# Altium PCB tach key1-3.PcbDoc
Units mm, origin at the board's own origin, x right, y up, seen from the top; angles counter-clockwise.
Board outline 151 x 86.38 mm, 2 copper layers (Top Layer, Bottom Layer); 36 components, 25 nets, 89 pads, 0 vias.
Unrouted connection lines stored in the file: 5.
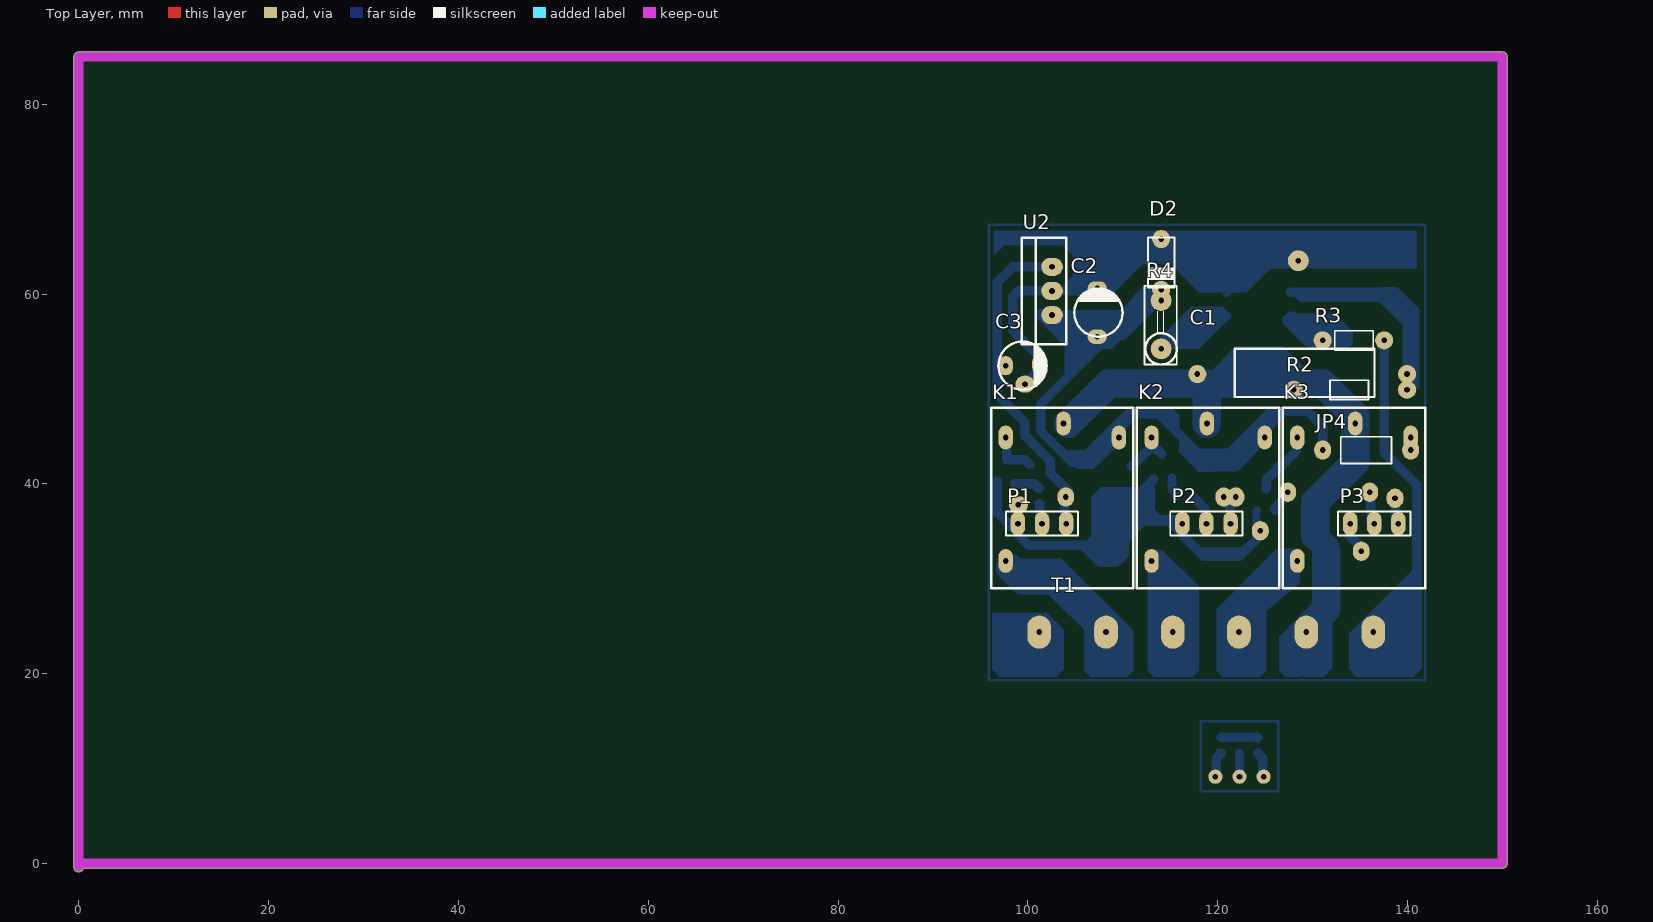
[diagram p0: Top Layer view]
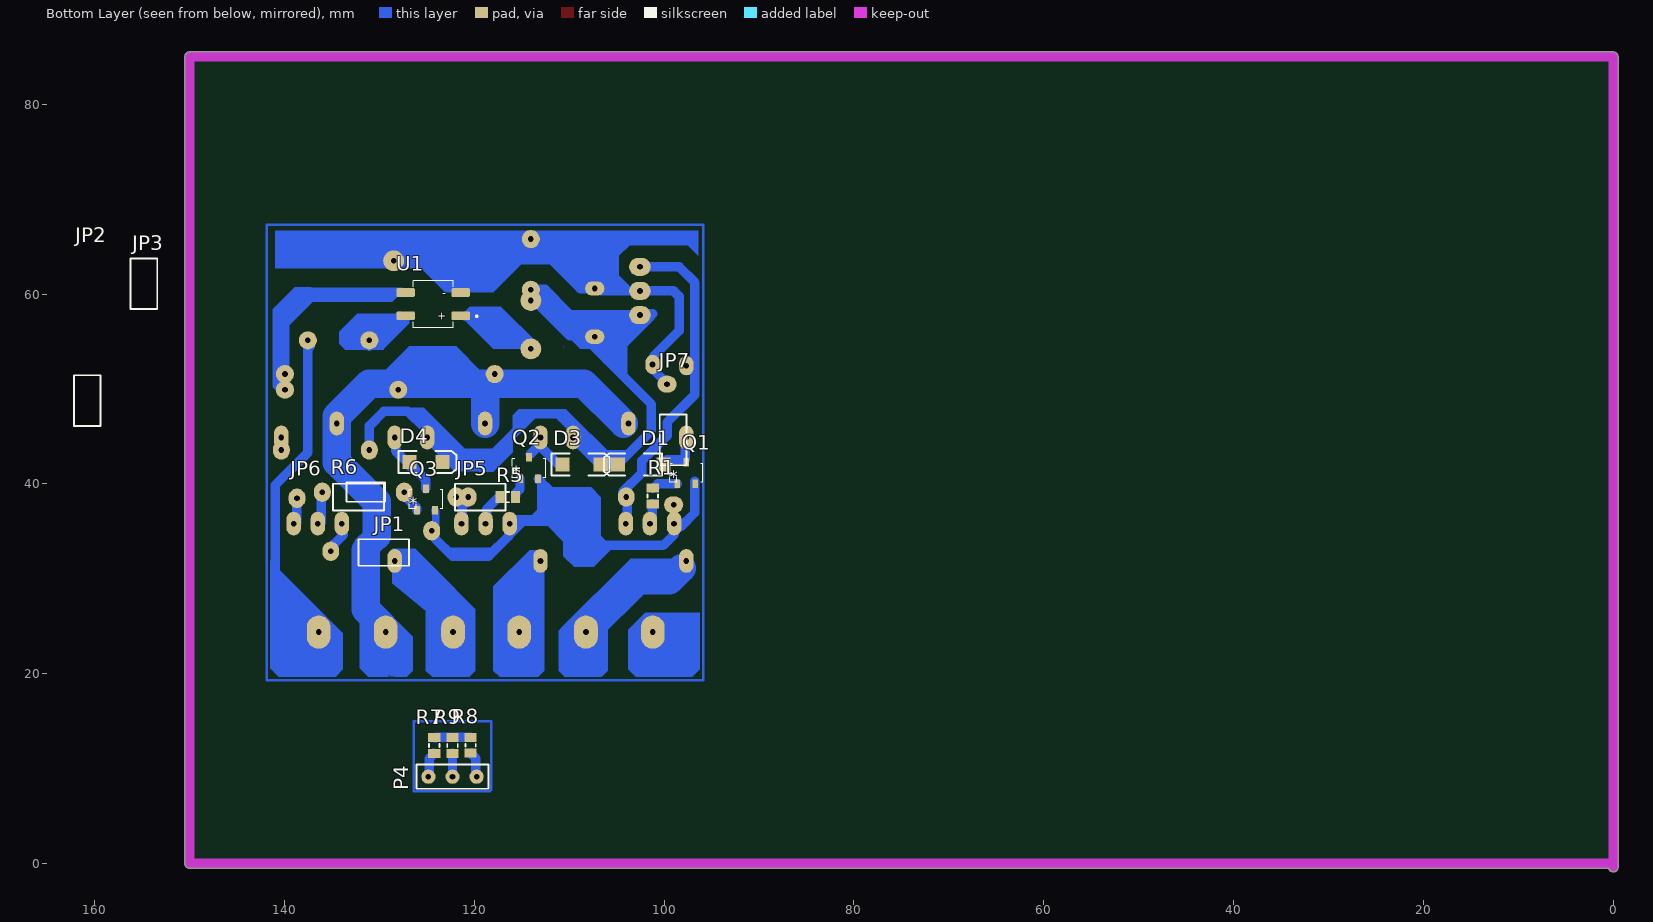
[diagram p1: Bottom Layer view, seen from below]
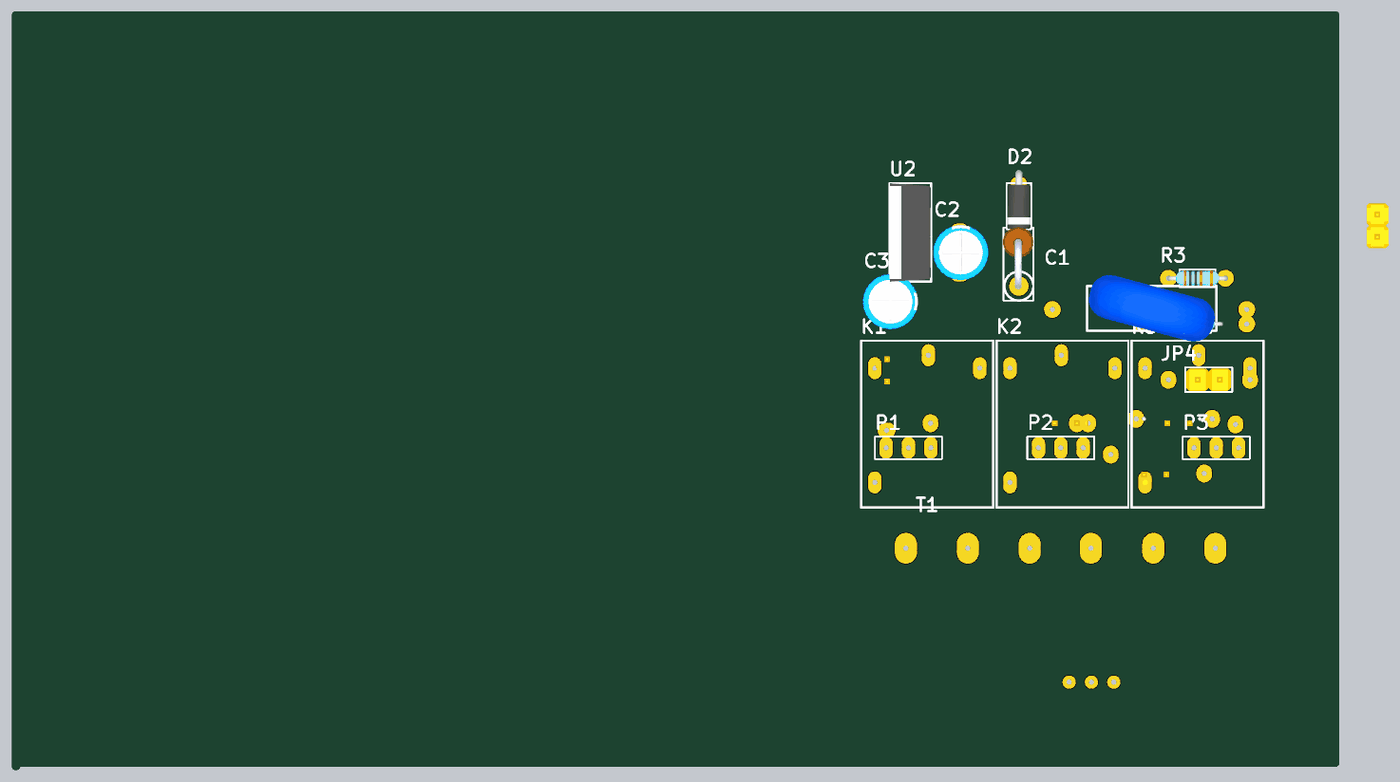
[diagram p2: 3D render of the assembled board from above, using the file's embedded part models]
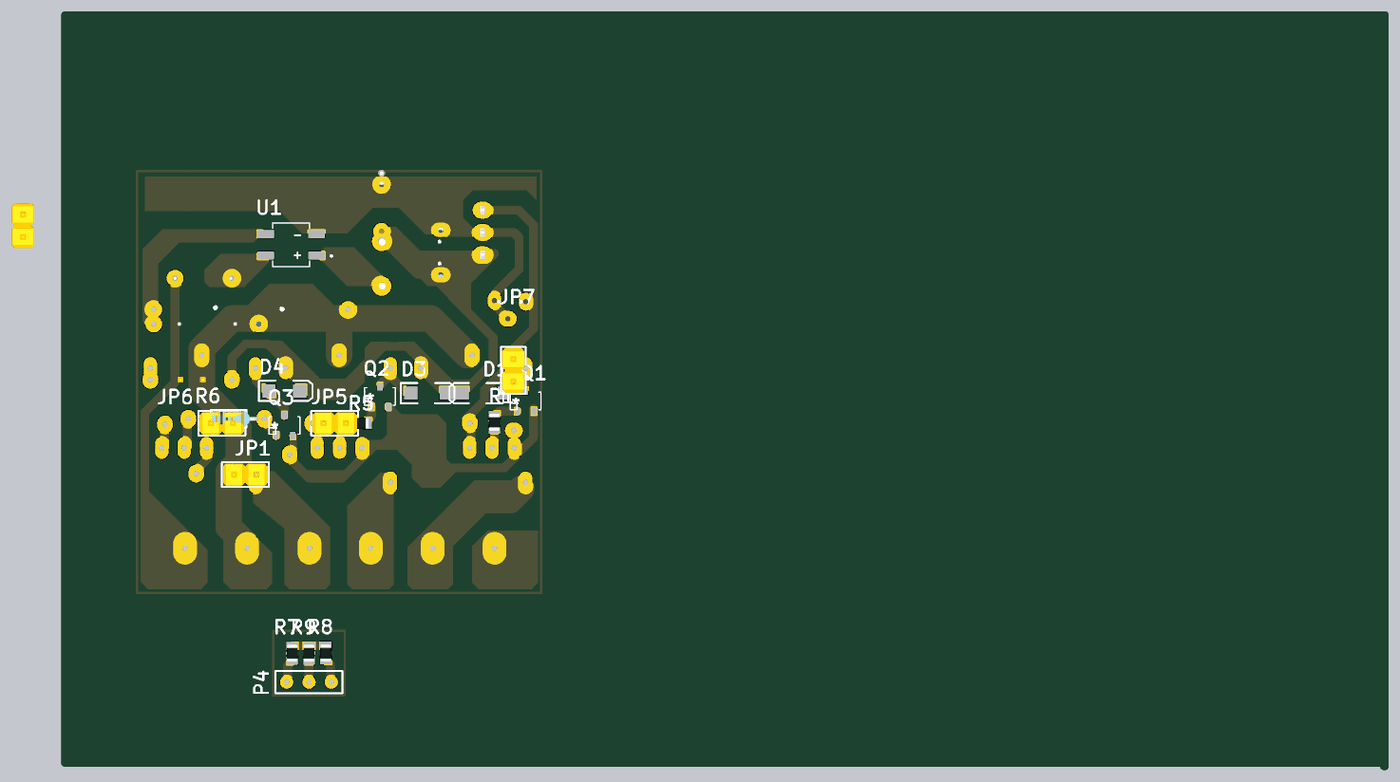
[diagram p3: 3D render of the assembled board from below, using the file's embedded part models]

## Layer stack, top to bottom
Top Solder: solder mask 0.0102, Solder Resist, Dk 3.5
Top Layer: signal copper 0.0356
Dielectric 1: dielectric 0.32, FR-4, Dk 4.8
Bottom Layer: signal copper 0.0356
Bottom Solder: solder mask 0.0102, Solder Resist, Dk 3.5

## Board outline
-0.5,-0.381 -0.5,85 cw(c0,85) 0,85.5 150,85.5 cw(c150,85) 150.5,85 150.5,0 cw(c150,0) 150,-0.5 0.486,-0.5 cw(c0,-0.381)

## Design rules (kind name [scope] priority, off if disabled: settings)
Clearance Clearance_1 [InPolygon] p1: gap=0.8 ignorepadtopadclearanceinfootprint=FALSE
Clearance [All] p2: gap=0.254 ignorepadtopadclearanceinfootprint=FALSE except(0: Arc-Hole Track-Hole SMDPad-Hole THPad-Hole Via-Hole Fill-Hole Poly-Hole Region-Hole Text-Hole)
PolygonConnect [All] p1: connectstyle=Relief reliefconductorwidth=0.254 reliefentries=4 polygonreliefangle="90 Angle" airgapwidth=0.254
RoomDefinition "tach key1-3" [InComponentClass('tach key1-3')] p1: confinementstyle=ConfineIn formatcopy=TRUE lockcomponents=FALSE outline 144.907,-4.953 247.904,-4.953 247.904,23.114 144.907,23.114
RoutingLayers [All] p1: top layer_v5=FALSE bottom layer_v5=TRUE
RoutingVias [All] p1: holewidth=0.711 width=2.5 viastyle="Through Hole" minholewidth=0.711 minwidth=1.27 maxholewidth=0.711 maxwidth=2
SolderMaskExpansion [All] p1: expansion=0.102 istentingtop=FALSE
Width [All] p1: maxlimit=3 minlimit=0.5 preferedwidth=1
29 further rules are at their usual default settings.

## Components (designator, comment, footprint, x,y, rotation, side; value= is the part's Value field where it differs from the comment)
C1 "=Value" CAP-30 129.159,51.689 r0 top
C2 "=Value" ELEC-CAP-RAD10-20#1 107.442,58.039 r270 top
C3 "=Value" ELEC-CAP-RAD10-20#2 99.441,52.451 r180 top
D1 "D Tunnel1" 3.2X1.6X1.1#1 103.124,42.037 r0 bottom
D2 "MODEL" DO-41 114.046,67.056 r270 top
D3 "D Tunnel1" 3.2X1.6X1.1#2 108.966,42.037 r180 bottom
D4 "D Tunnel1" 3.2X1.6X1.1#3 125.095,42.291 r180 bottom
JP1 "Jumper" "Header 2X1"#1 129.54,32.766 r0 bottom
JP2 "Jumper" "Header 2X1"#2 160.782,48.768 r90 bottom
JP3 "Jumper" "Header 2X1"#3 154.813,61.087 r90 bottom
JP4 "Jumper" "Header 2X1"#4 135.636,43.561 r180 top
JP5 "Jumper" "Header 2X1"#5 119.38,38.608 r0 bottom
JP6 "Jumper" "Header 2X1"#6 132.207,38.608 r0 bottom
JP7 "Jumper" "Header 2X1"#7 99.06,44.631 r270 bottom
K1 "Relay-12vDC" Relays#1 111.125,48.006 r180 top
K2 "Relay-12vDC" Relays#2 126.492,48.006 r180 top
K3 "Relay-12vDC" Relays#1 141.859,48.006 r180 top
P1 "Header 3" HDR1X3#1 98.954,35.81 r0 top
P2 "Header 3" HDR1X3#1 116.276,35.81 r0 top
P3 "Header 3" HDR1X3#1 133.954,35.81 r0 top
P4 "Header 3" HDR1X3#2 119.761,9.144 r0 bottom
Q1 "MMBT3904-TP" SOT23-3 98.933,41.141 r180 bottom
Q2 "MMBT3904-TP" SOT23-3 115.509,41.663 r180 bottom
Q3 "MMBT3904-TP" SOT23-3 126.365,38.354 r180 bottom
R1 "10K" "RES 0805 (2012X06L)" 101.219,38.735 r90 bottom
R2 "10K" Res-(1/4)#1 133.858,49.911 r180 top
R3 "10K" Res-(1/4)#2 134.366,55.118 r0 top
R4 "10K" Res-(2/1)-Stand 114.046,54.222 r90 top
R5 "10K" "RES 0805 (2012X06L)" 116.459,38.608 r180 bottom
R6 "10K" Res-(1/4)#3 131.445,39.116 r180 bottom
R7 "10K" "RES 0805 (2012X06L)" 124.206,12.446 r90 bottom
R8 "10K" "RES 0805 (2012X06L)" 120.396,12.446 r270 bottom
R9 "10K" "RES 0805 (2012X06L)" 122.301,12.446 r90 bottom
T1 "Phoenix terminal" "phoenix terminal 6" 102.341,12.7 r0 top
U1 "MB6S" SOIC245P670X270-4N 124.333,58.928 r0 bottom
U2 "L78XXCV" TO-220 102.552,60.325 r90 top

## Footprints (in the part's own frame and the unit in brackets; to place one, negate y for a bottom-side part, rotate by r counter-clockwise, add the part's x,y. Pads: shape width x height; smd on the part's side, far side on the other; paste and mask are expansions set on the pad)
3.2X1.6X1.1#1 [mm] "SMT LED; 2 Flat Leads"
  rect 1.5x1.5 smd: 1(-3.048,0) 2(1.75,0)
  silkscreen extent -2.9,-1.15 3.2,1.15
3.2X1.6X1.1#2 [mm] "SMT LED; 2 Flat Leads"
  rect 1.5x1.5 smd: 1(-1.75,0) 2(2.286,0)
  silkscreen extent -2.9,-1.15 3.2,1.15
3.2X1.6X1.1#3 [mm] "SMT LED; 2 Flat Leads"
  rect 1.5x1.5 smd: 1(-1.75,0) 2(1.75,0)
  silkscreen extent -2.9,-1.15 3.2,1.15
CAP-30 [mil]
  round 75 hole 23.62: 1(-445,-5) 2(425,-5)
  silkscreen extent -290,-100 290,100, body extent -301,-169 301,169, height 707
DO-41 [mm]
  round 1.905 hole 0.6: 1(1.27,0) 2(6.604,0)
  silkscreen extent 1.1,-1.5 6.35,1.5, body extent -0.41,-1.33 8,1.33, height 3.33
ELEC-CAP-RAD10-20#1 [mil]
  oval 60x80 hole 23.62: 1(-100,-5) 2(100,-5)
  silkscreen extent -100,-100 100,100, body extent -124,-124 124,124, height 404
ELEC-CAP-RAD10-20#2 [mil]
  oval 60x80 hole 23.62: 1(-70,-5) 2(70,0)
  silkscreen extent -100,-100 100,100, body extent -124,-124 124,124, height 404
HDR1X3#1 [mm] "Connector; Header; 3 Position"
  oval 1.524x2.5 hole 0.6: 1(0,0) 2(2.54,0) 3(5.08,0)
  silkscreen extent -1.27,-1.27 6.35,1.27
HDR1X3#2 [mm] "Connector; Header; 3 Position"
  round 1.5 hole 0.6: 1(0,0) 2(2.54,0) 3(5.08,0)
  silkscreen extent -1.27,-1.27 6.35,1.27
"Header 2X1"#1 [mil]
  oval 70x80 hole 23.62: 1(-198.43,-90) 2(220,-5)
  silkscreen extent -105,-55 105,55, body extent -100,-50 100,50, height 374
"Header 2X1"#2 [mil]
  round 86.61 hole 23.62: 1(580,-1270.94)
  silkscreen extent -105,-55 105,55, body extent -100,-50 100,50, height 374
"Header 2X1"#3 [mil]
  silkscreen extent -105,-55 105,55, body extent -100,-50 100,50, height 374
"Header 2X1"#4 [mil]
  oval 70x80 hole 23.62: 1(-185,0) 2(180,0)
  silkscreen extent -105,-55 105,55, body extent -100,-50 100,50, height 374
"Header 2X1"#5 [mil]
  oval 70x80 hole 23.62: 1(-605.51,0) 2(50,0)
  silkscreen extent -105,-55 105,55, body extent -100,-50 100,50, height 374
"Header 2X1"#6 [mil]
  oval 70x80 hole 23.62: 1(-405,0) 2(255,5)
  silkscreen extent -105,-55 105,55, body extent -100,-50 100,50, height 374
"Header 2X1"#7 [mil]
  oval 70x80 hole 23.62: 1(-231.06,-25) 2(268.94,2.36)
  silkscreen extent -105,-55 105,55, body extent -100,-50 100,50, height 374
"phoenix terminal 6" [mm] "6 terminals"
  oval 2.5x3.5 hole 0.6: 1(-1.143,11.684) 2(5.897,11.684) 3(12.937,11.684) 4(19.897,11.684) 5(26.997,11.684) 6(34.057,11.684)
Relays#1 [mil]
  oval 60x98.43 hole 23.62: 1(290,65) 3(530,635) 4(60,123.11) 5(530,123.11)
  silkscreen extent 0,0 591,748
Relays#2 [mil]
  oval 60x98.43 hole 23.62: 1(300,65) 3(530,635) 4(60,123.11) 5(530,123.11)
  silkscreen extent 0,0 591,748
"RES 0805 (2012X06L)" [mm] "Chip Resistor, 2-Leads, Body 2.0x1.3mm, IPC High Density _ (0.100 W)"
  rect 0.95x1.3 smd: 1(-0.838,0) 2(0.812,0)
  silkscreen extent -0.16,-0.55 0.14,0.55, body extent -1.03,-0.63 1,0.64, height 0.6
Res-(1/4)#1 [mm]
  round 1.905 hole 0.6: 1(-6.096,0) 2(5.842,0)
  silkscreen extent -2.03,-1.02 2.03,1.02, body extent -3.43,-0.93 3.43,0.91, height 2.92
Res-(1/4)#2 [mm]
  round 1.905 hole 0.6: 1(-3.302,0) 2(3.175,0)
  silkscreen extent -2.03,-1.02 2.03,1.02, body extent -3.43,-0.93 3.43,0.91, height 2.92
Res-(1/4)#3 [mm]
  oval 1.778x2.032 hole 0.6: 1(-4.572,0) 2(4.064,0)
  silkscreen extent -2.03,-1.02 2.03,1.02, body extent -3.43,-0.93 3.43,0.91, height 2.92
Res-(2/1)-Stand [mm]
  round 2.2 hole 0.6: 1(0,0) 2(5.087,0)
  silkscreen extent -1.65,-1.65 6.65,1.75, body extent -0.4,-1.68 6.76,1.83, height 13.6
SOIC245P670X270-4N [mm]
  rrect23% 1.91x0.91 smd: 1(-2.9,1.225) 2(-2.9,-1.225) 3(2.9,-1.225) 4(2.9,1.225)
  silkscreen extent -4.68,-2.48 2.1,2.48
SOT23-3 [mm]
  rect 0.6x0.9 smd: 1(0.32,-1.15) 2(2.22,-1.15) 3(1.27,1.15)
  silkscreen extent -0.48,-1 3.02,1
TO-220 [mm]
  oval 1.905x2.286 hole 0.6: 1(-2.54,0) 2(0,0) 3(2.54,0)
  silkscreen extent -5.61,-1.5 5.61,3.19, body extent -5.61,-1.5 5.61,3.19, height 19.83

## Part data
C1: library part Capacitor, "Capacitor"
C2 C3: library part "Capacitor Electrolytic", "Electrolytic Capacitor"
D1 D3 D4: "Tunnel Diode - RLC Model", LatestRevisionDate=17-Jul-2002, LatestRevisionNote="Re-released for DXP Platform.", PackageDescription="SM LED; 2 Flat Leads", PackageReference=3.2X1.6X1.1, PackageVersion=Feb-2002, Published=8-Jun-2000, Publisher="Altium Limited"
D2: library part Diode, "Diode", MODEL=1N4148
K1 K2 K3: library part Relay-05vDC, "Relay-05vDC-240AC 5A", ComponentLinkURL=www.picpars.com, Designer="Seyed Mohsen Ghasemain"
P1 P2 P3 P4: "Header, 3-Pin", LatestRevisionDate=17-Jul-2002, LatestRevisionNote="Re-released for DXP Platform.", Publisher="Altium Limited"
Q1 Q2 Q3: "Bipolar _BJT_ Transistor NPN 40V 200mA 300MHz 350mW Surface Mount SOT-23", Package="SOT-23 Micro Commercial", Availability=Unavailable, MF="Micro Commercial", MP=MMBT3904-TP, Price=None, SnapEDA_Link=https://www.snapeda.com/parts/MMBT3904-TP/Micro%20Commercial/view-part/805928/?ref=snap
R1 R2 R3 R4 R5 R6 R7 R8 R9: library part Resistor, "Resistor", Power="1/4 W", Tolerance=5%
T1: library part "Phoenix terminal 6", "Terminal 6 Pin", ComponentLinkURL=www.picpars.com, Designer="Seyed Mohsen Ghasemain", E-mail=picpars@gmail.com
U1: "Bridge Rectifier Single Phase Standard 600V Surface Mount 4-SOIC", Package="BESOP-4 Surge Components", Digi-Key_Part_Number=MB6SCT-ND, Digi-Key_Purchase_URL=https://www.digikey.com.tr/product-detail/en/on-semiconductor/MB6S/MB6SCT-ND/965654?utm_source=snapeda&utm_medium=aggregator&utm_campaign=symbol, MF="ON Semiconductor", MP=MB6S, SnapEDA_Link=https://www.snapeda.com/parts/MB6S/ON%20Semiconductor/view-part/2774209/?ref=snap
U2: "Fixed Voltage Regulator"

## Nets (pads, with @x,y where several pads share a name; then routed paths per layer and width w, separated by ;. In a path a pad name is that pad's centre, name@x,y a point inside that pad or via, vN(x,y) a via of type N, cw(c..) or ccw(c..) an arc to the next point about the centre after c; other vN are vias at no path point)
faz: C1.1 K1.1 K2.1 K3.1 R2.2 T1.5 | length 61.4
  Bottom Layer w3: K1.1@104.267,46.355 108.458,50.546 118.872,50.546 ; K2.1 118.872,50.546 ; T1.5 129.588,24.634 129.588,24.94 131.445,26.797 131.445,33.02 ; 130.302,34.544 130.302,38.1 134.493,42.291 K3.1 134.493,47.117 131.064,50.546 118.872,50.546
GND: C2.1 C3.1 D2.1 JP1.1 JP1.2 JP2.1 JP7.1 JP7.2 P1.1 P2.1 P3.1 Q1.2 Q2.2 Q3.2 U1.2 U2.2 | length 84.6
  Bottom Layer w0.8: JP1.1@124.079,34.163 124.079,36.812 124.095,36.828 124.095,37.154 Q3.2
  Bottom Layer w1: Q1.2@96.774,40.259 96.774,36.957 98.267,35.464 98.458,35.464 98.7,35.706 P1.1@98.7,35.81 ; P1.1@98.933,34.671 100.076,33.528 109.347,33.528 112.903,37.084 112.903,40.127 Q2.2 ; JP7.1@99.768,50.565 99.768,50.648 101.092,51.973 101.092,53.467 98.425,56.134 98.425,59.739 99.011,60.325 C2.1@106.68,60.325 ; C2.1 108.839,60.579 D2.1 115.697,65.786 120.978,60.505 U1.2@120.978,60.198 ; 112.776,37.211 113.792,36.195 116.034,36.195 116.276,35.953 P2.1 116.376,35.71 116.376,34.5 118.491,32.385 122.301,32.385 JP1.1@124.079,34.163 ; P3.1@133.7,35.81 133.8,35.71 133.8,34.633 134.739,33.694 134.739,33.62 135.128,33.231 JP1.2
NetC1_2: C1.2 R2.1 U1.3 | length 21.3
  Bottom Layer w1: U1.3@127.688,60.198 137.795,60.198 139.954,58.039 C1.2 R2.1
NetD1_1: D1.1 K1.5 Q1.3 | length 5
  Bottom Layer w1: K1.5 97.763,44.779 97.763,42.52 99.72,42.52 D1.1@100.203,42.037
NetD3_1: D3.1 K2.5 Q2.3 | length 5.2
  Bottom Layer w1: D3.1@110.92,41.832 K2.5@112.93,43.842 ; K2.5 113.13,44.779 113.13,43.842 113.384,43.842 Q2.3@114.133,43.093
NetD4_1: D4.1 K3.5 Q3.3 | length 7
  Bottom Layer w1: Q3.3 125.095,40.386 126.341,41.632 126.341,41.787 D4.1@126.742,41.787 ; D4.1@126.591,42.037 126.841,42.287 127.123,42.287 128.297,43.461 128.297,44.779 K3.5
NetP1_2: P1.2 R1.1 | length 2.1
  Bottom Layer w1: R1.1 101.23,37.886 101.23,35.82 P1.2@101.24,35.81
NetP2_2: P2.2 R5.1 | length 3.3
  Bottom Layer w1: R5.1@117.449,38.585 118.716,37.318 118.716,35.91 P2.2
NetP3_2: P3.2 R6.1 | length 3.4
  Bottom Layer w1: R6.1 136.14,38.993 136.14,35.91 P3.2@136.24,35.81
NetP4_1: P4.1 R8.2 | length 2.8
  Bottom Layer w1: P4.1 119.857,9.24 119.857,11.095 120.246,11.484 120.246,11.609 120.271,11.634 R8.2
NetP4_2: P4.2 R9.1 | length 2.5
  Bottom Layer w1: P4.2 R9.1
NetP4_3: P4.3 R7.1 | length 2.8
  Bottom Layer w1: R7.1 124.331,11.608 124.356,11.583 124.356,11.458 124.745,11.068 124.745,9.24 P4.3
NetQ1_1: Q1.1 R1.2 | length 2.8
  Bottom Layer w1: Q1.1 100.65,39.991 101.069,39.572 101.194,39.572 R1.2
NetQ2_1: Q2.1 R5.2 | length 2
  Bottom Layer w1: Q2.1@115.189,40.612 115.189,39.445 115.647,38.987 R5.2@115.647,38.758
NetQ3_1: Q3.1 R6.2 | length 2.5
  Bottom Layer w1: Q3.1 126.045,37.442 127.381,38.778 R6.2
NetR3_1: R3.1 U1.4 | length 4.7
  Bottom Layer w1: U1.4@127.688,57.658 127.889,57.658 R3.1@131.064,54.483
NetR4_1: R4.1 U1.1 | length 8.4
  Bottom Layer w1: R4.1 114.371,54.222 114.959,54.81 115.135,54.81 117.983,57.658 U1.1@120.978,57.658
NetR7_2: R7.2 R8.1 R9.2 | length 3.8
  Bottom Layer w1: R8.1 124.055,13.284 124.081,13.258 R7.2
nol: R3.2 T1.6 | length 34
  Bottom Layer w1: T1.6@136.652,23.778 140.978,28.104 140.978,39.87 137.541,43.307 137.541,54.229 R3.2@137.287,54.483
o1: K1.3 T1.2 | length 12.9
  Bottom Layer w3: K1.3@98.171,31.115 99.441,29.845 102.777,29.845 T1.2
o2: K2.3 T1.3 | length 9.4
  Bottom Layer w1: K2.3 113.13,31.777 113.13,30.918 113.284,30.764 113.284,27.178 115.193,25.269 115.193,23.782 T1.3@115.48,23.495
o3: K3.3 T1.4 | length 11.6
  Bottom Layer w1: T1.4@122.44,23.495 122.44,23.692 124.079,25.331 124.079,28.575 126.793,31.289 128.155,31.289 128.397,31.531 K3.3
o4: T1.1 | length 2.9
  Bottom Layer w1: T1.1@101.358,23.703 101.4,23.661 T1.1@101.4,23.578
  Bottom Layer w1.5: 99.187,24.975 100.086,24.975 100.483,24.578 100.629,24.578 101.358,23.85 T1.1@101.358,23.703
VCC: C2.2 D1.2 D2.2 D3.2 D4.2 JP4.1 JP4.2 K1.4 K2.4 K3.4 R4.2 U2.1 | length 70.2
  Bottom Layer w1: 101.219,57.912 102.425,57.912 U2.1 ; U2.1@102.567,57.785 104.753,55.599 106.045,55.599 ; K1.4 109.601,44.533 109.359,44.291 109.013,44.291 107.009,42.287 106.93,42.287 D3.2 105.382,42.037 105.132,42.287 104.624,42.287 104.624,42.315 101.346,45.593 101.346,48.387 106.045,53.086 106.045,55.599 ; K1.4@109.701,44.979 109.701,45.947 111.125,47.371 113.792,47.371 119.38,41.783 121.872,41.783 122.609,42.52 122.99,42.901 124.38,44.291 124.726,44.291 124.968,44.533 124.968,45.509 125.23,45.771 125.23,45.855 127,47.625 129.54,47.625 131.064,46.101 JP4.2 ; R4.2@114.173,59.817 109.955,55.599 107.315,55.599 106.045,55.599
vDD: C3.2 JP5.1 JP5.2 JP6.1 JP6.2 P1.3 P2.3 P3.3 U2.3 | length 40.4
  Bottom Layer w1: U2.3 98.425,62.865 96.766,61.206 96.766,49.411 99.695,46.482 99.695,45.085 102.362,42.418 102.362,41.148 JP5.1@104.388,39.122 ; P1.3@103.88,35.995 103.88,38.488 JP5.1 ; JP5.2 120.65,38.27 121.256,37.665 121.256,35.91 P2.3 ; JP6.2 138.859,38.679 JP6.2@138.858,38.704 ; JP6.2@138.732,38.433 138.732,35.858 P3.3@138.78,35.81
copper on no net: | length 218.9
  Bottom Layer w0.254: 95.885,19.304 141.859,19.304 141.859,67.31 95.885,67.31 95.885,19.304 ; 118.237,7.747 118.364,7.62 126.365,7.62 126.365,14.986 118.491,14.986 118.237,14.986 118.237,7.747

## Polygon pours and split planes (outlines as drawn)
GND on Bottom Layer "GND_L02_P002" (solid, pour order 2): 116.332,39.751
no net on Bottom Layer "NONET_L02_P000" (solid, pour order 0): 91.059,37.973

## Keep-outs
Keep-Out Layer:
  lines w1: 0,-0.381 0,85 150,85 150,0 0,0

## Other copper
Bottom Layer:
  region net GND: 105.537,33.147 107.442,31.242 109.474,31.242 110.617,32.385 110.617,33.909 112.268,35.56 114.681,35.56 116.034,34.207 116.034,36.195 113.919,36.195 113.157,36.957
  region net faz: 132.588,34.036
  region net faz: 129.032,33.782 130.429,32.385 130.937,32.385 132.588,34.036 131.445,35.179
  region net faz: 129.032,33.782
  region net GND: 118.11,33.274 122.682,33.274 122.301,32.893 122.301,32.385 118.491,32.385
  region net GND: 106.045,33.909 106.68,34.544 106.68,38.608 107.696,39.624 111.76,39.624 112.776,40.64 112.903,40.513 112.903,36.83 109.474,33.401 108.839,33.401
  region net VCC: 115.951,44.958 115.951,43.307 117.983,41.275 119.507,41.275
  region net VCC: 117.856,43.688 121.031,43.688 125.349,48.006 127.254,48.006 124.968,45.72 124.968,44.879 121.872,41.783 119.761,41.783
  region: 115.697,42.926
  region net VCC: 113.284,47.879 115.316,47.879 115.951,47.244 115.951,45.212
  region net VCC: 103.886,43.561 107.315,43.561 105.791,42.037 104.874,42.037
  region net VCC: 105.156,42.672 110.363,47.879 112.141,47.879 106.424,42.162 105.257,42.162
  region net NetC1_2: 140.208,49.149 141.224,50.165 141.224,58.42 138.938,60.706 137.16,60.706 137.16,60.261 139.827,57.594
  region net faz: 118.999,51.816 119.253,51.816 121.92,54.483 126.873,54.483 129.667,51.689
  region net NetR3_1: 128.016,57.912 132.334,57.912 134.239,56.007 134.239,54.737 133.604,54.102 129.54,54.102 129.54,54.229 126.873,56.896 126.873,57.658
  region net NetC1_2: 128.016,60.071 128.016,59.817 128.651,59.182 137.033,59.182 139.7,56.515 139.827,56.642 139.827,58.547 139.319,58.547 137.414,60.452
  region net NetR4_1: 114.046,53.848 114.427,54.229 117.983,54.229 120.777,57.023 120.777,57.047 121.433,57.703 120.462,58.674 117.221,58.674 113.284,54.737 113.284,54.356
  region net VCC: 102.616,58.293 109.728,58.293 112.395,60.96 113.792,60.96 113.792,60.198 114.173,59.817 112.903,58.547 112.903,58.166 112.776,58.166 108.839,54.229 107.823,54.229 105.029,51.435 103.886,51.435 103.886,54.483 100.965,57.404
  region net GND: 103.477,60.678 104.775,61.976 104.775,64.008 103.632,65.151 97.536,65.151 96.393,64.008 96.393,66.675 140.97,66.675 140.97,62.738 125.603,62.738 123.063,60.198 117.983,60.198 115.062,63.119 112.014,63.119 109.347,60.452
  region net nol: 140.589,19.685 141.478,20.574 141.478,31.877 133.858,24.257 133.858,20.447 134.62,19.685
  region net o3: 119.888,26.797 119.888,20.32 120.523,19.685 124.46,19.685 125.095,20.32 125.095,30.988 124.079,30.988
  region net o2: 112.649,25.908 112.649,20.32 113.284,19.685 117.348,19.685 117.983,20.32 117.983,23.749
  region net o1: 105.918,25.908 105.918,20.32 106.553,19.685 110.49,19.685 111.125,20.32 111.125,24.511 108.556,27.08
  region net o4: 96.266,26.416 96.266,20.447 97.028,19.685 102.997,19.685 103.759,20.447 103.759,24.638 101.981,26.416
  region net faz: 129.286,19.812 129.159,19.812 129.032,19.685 127.127,19.685 126.492,20.32 126.492,23.876 131.064,28.448 132.08,27.432 132.08,20.574 131.191,19.685 128.016,19.685
  region net o3: 123.856,25.6 128.651,29.544 128.651,33.147 126.238,33.147 122.132,29.041
  region net o2: 113.792,21.844 112.649,22.987 112.649,32.385 113.284,33.02 114.173,33.02 117.983,29.21 117.983,23.749 117.983,22.86 116.967,21.844
  region net o1: 98.499,32.057 105.918,24.638 105.918,23.114 107.188,21.844 109.601,21.844 110.871,23.114 110.871,24.765 103.505,32.131 98.539,32.131
  region net o4: 96.83,26.162 99.568,26.162 99.949,25.781 102.616,25.781 103.378,25.019 103.378,23.241 101.257,21.12
  region net GND: 110.617,54.483 110.617,54.356
  region net o4: 97.536,26.44 97.536,21.844 101.092,21.844 101.092,23.876

## Text inside footprints (layer, text, board x,y; h text height)
Q1: Bottom Overlay "*" at 99.413,40.141 h1.27
Q2: Bottom Overlay "*" at 115.989,40.663 h1.27
Q3: Bottom Overlay "*" at 126.845,37.354 h1.27
U1: Bottom Overlay "-" at 122.933,60.328 h0.81 r180; Bottom Overlay "+" at 122.934,58.038 h0.81 r180